# Altium PCB LM399.PcbDoc
Units mm, origin at the board's own origin, x right, y up, seen from the top; angles counter-clockwise.
Board outline 82.6 x 50.5 mm, 4 copper layers (Top Layer, Layer 1, Layer 2, Bottom Layer), stack 1.587 mm thick; 51 components, 21 nets, 188 pads, 258 vias.
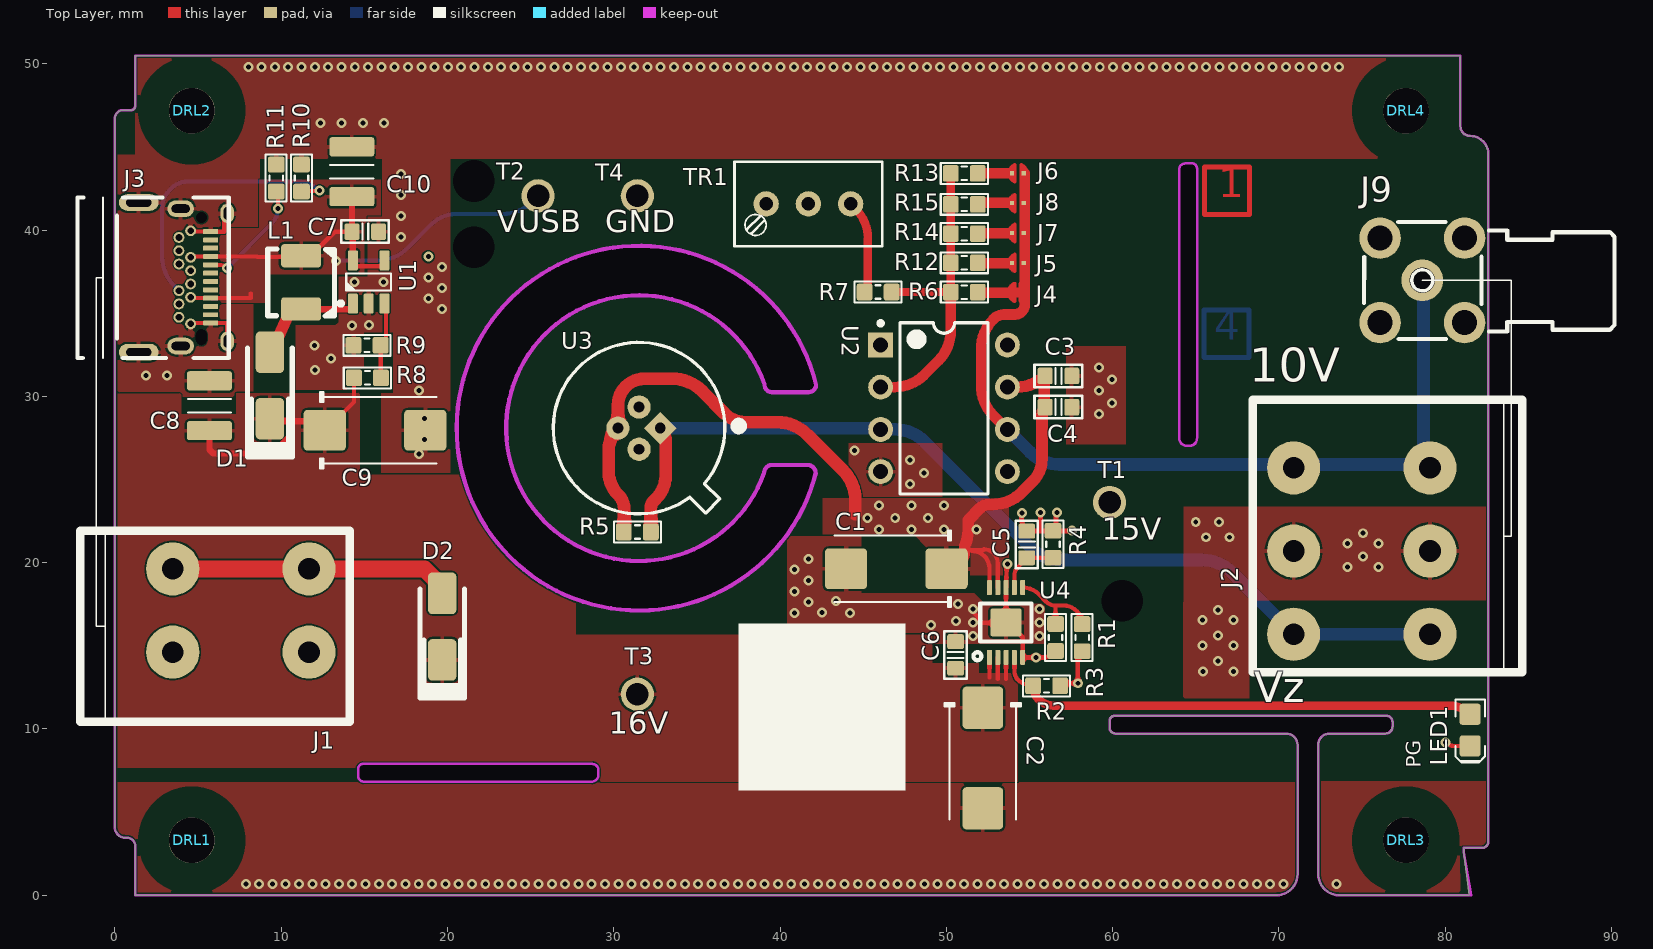
[diagram p0: Top Layer view]
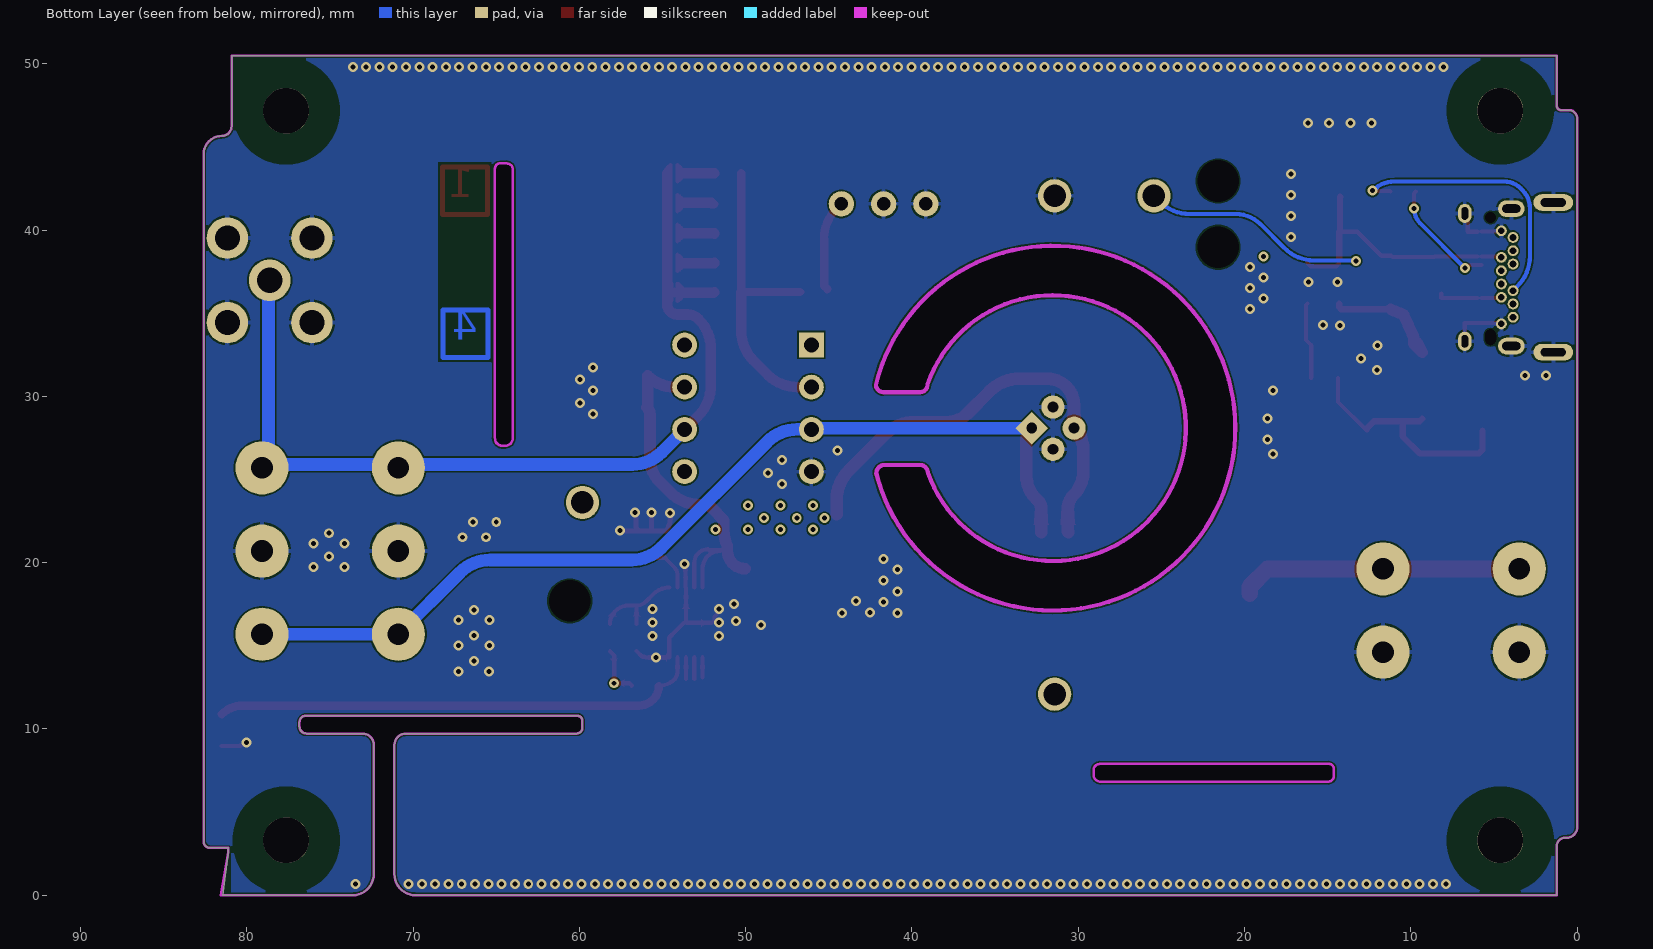
[diagram p1: Bottom Layer view, seen from below]
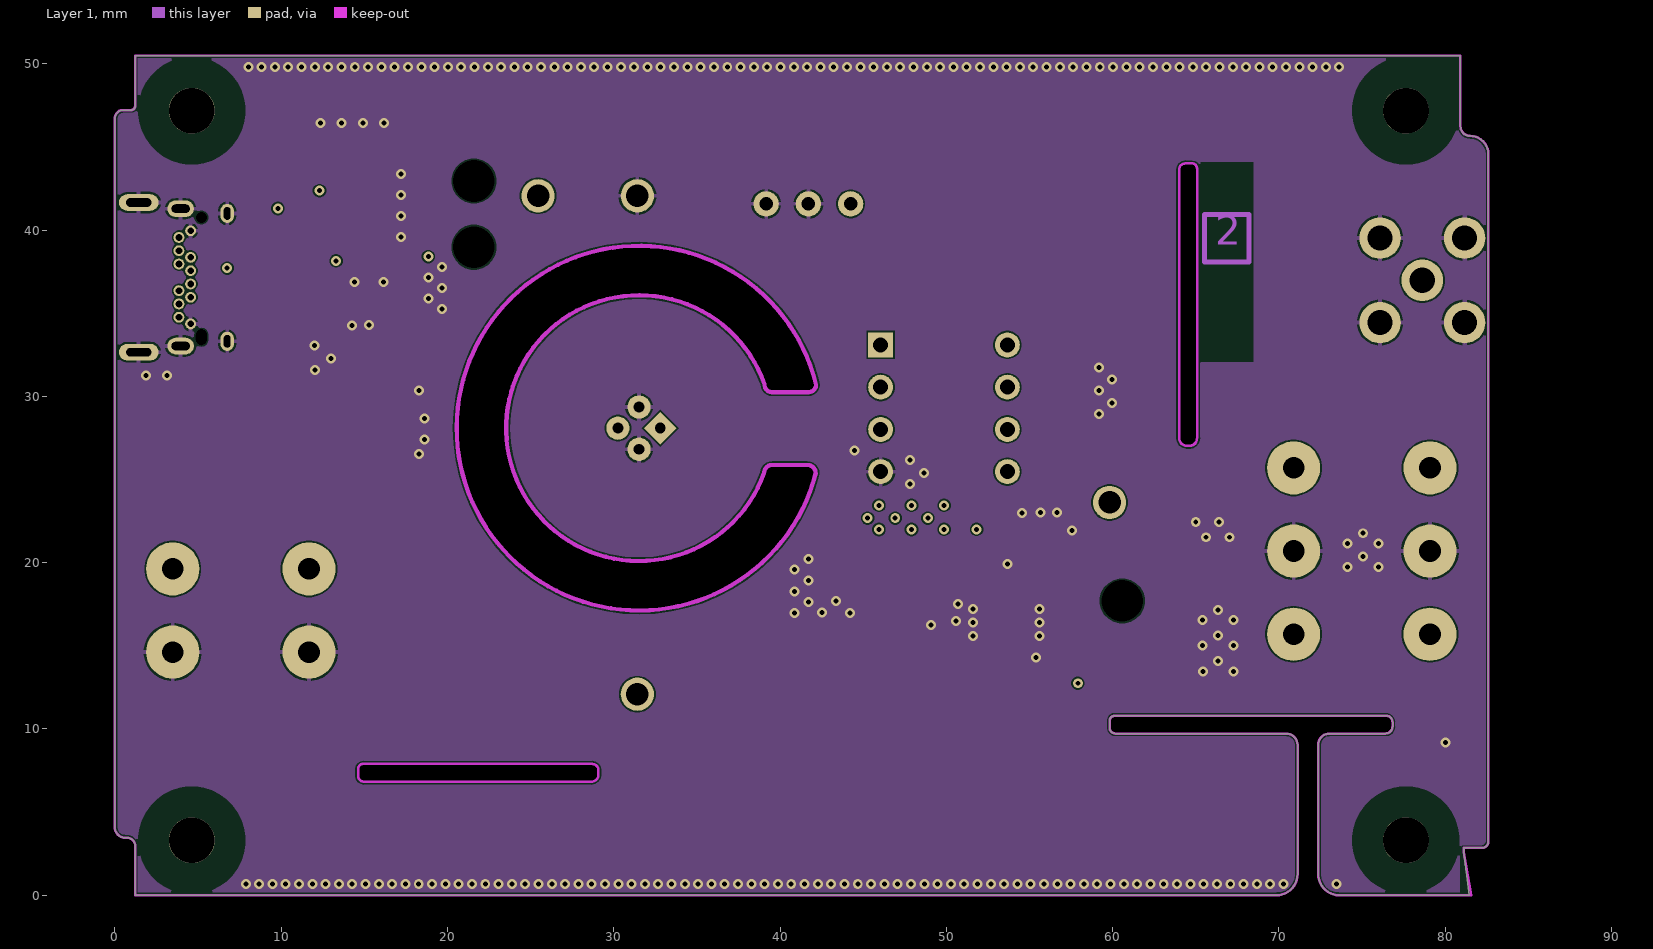
[diagram p2: Layer 1]
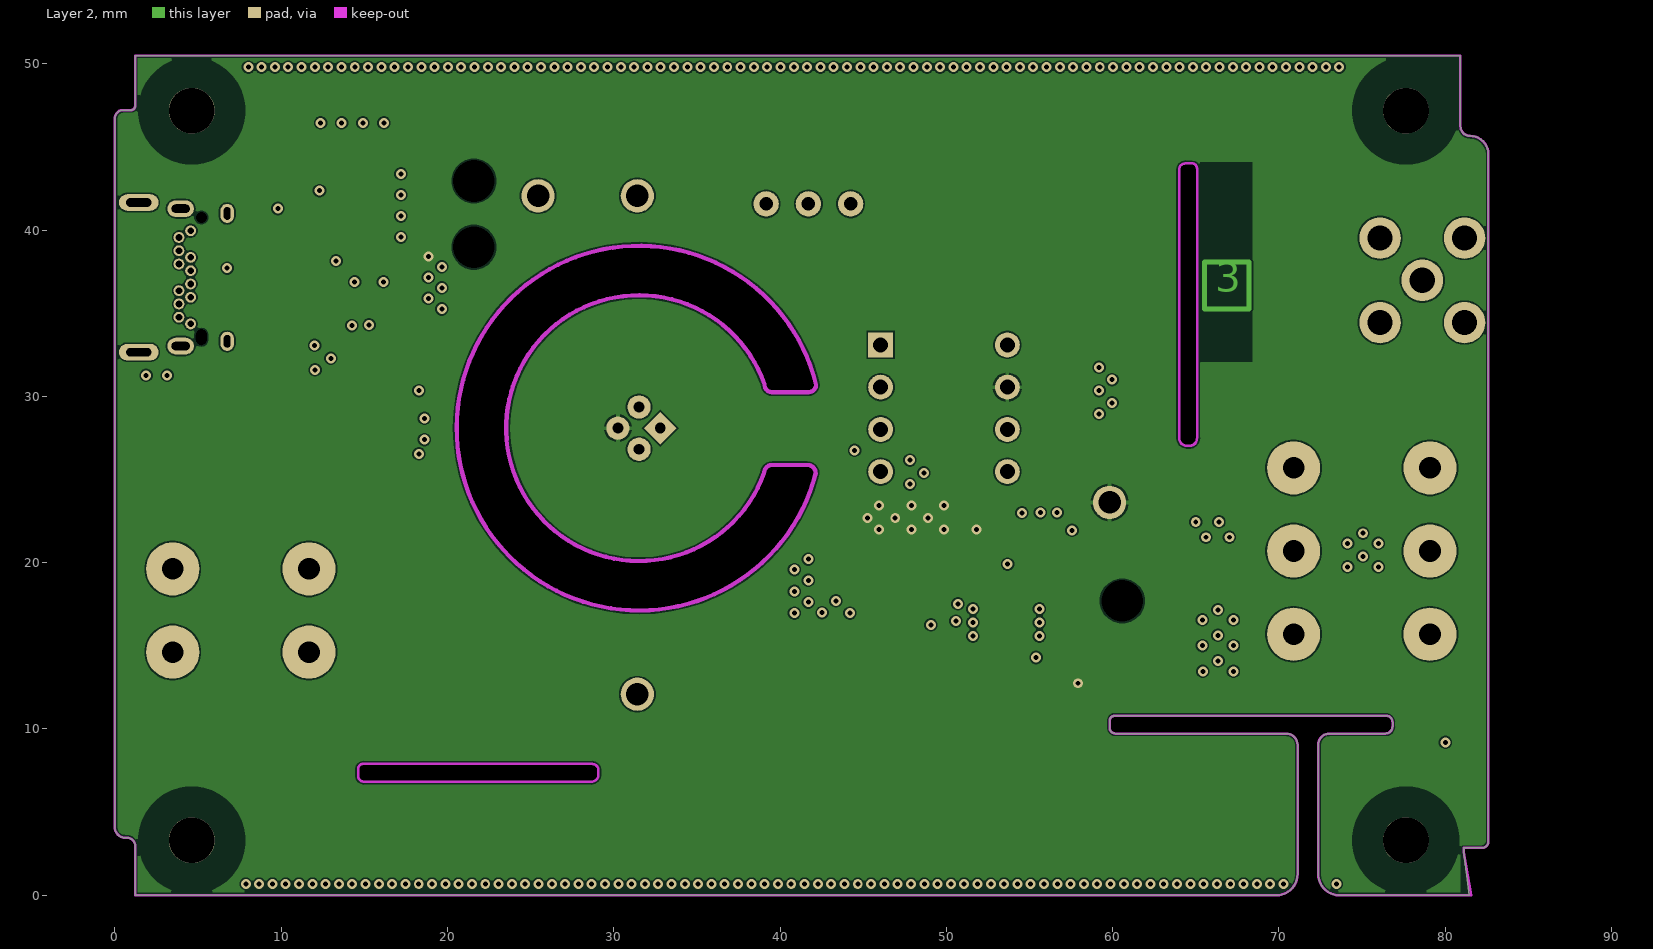
[diagram p3: Layer 2]
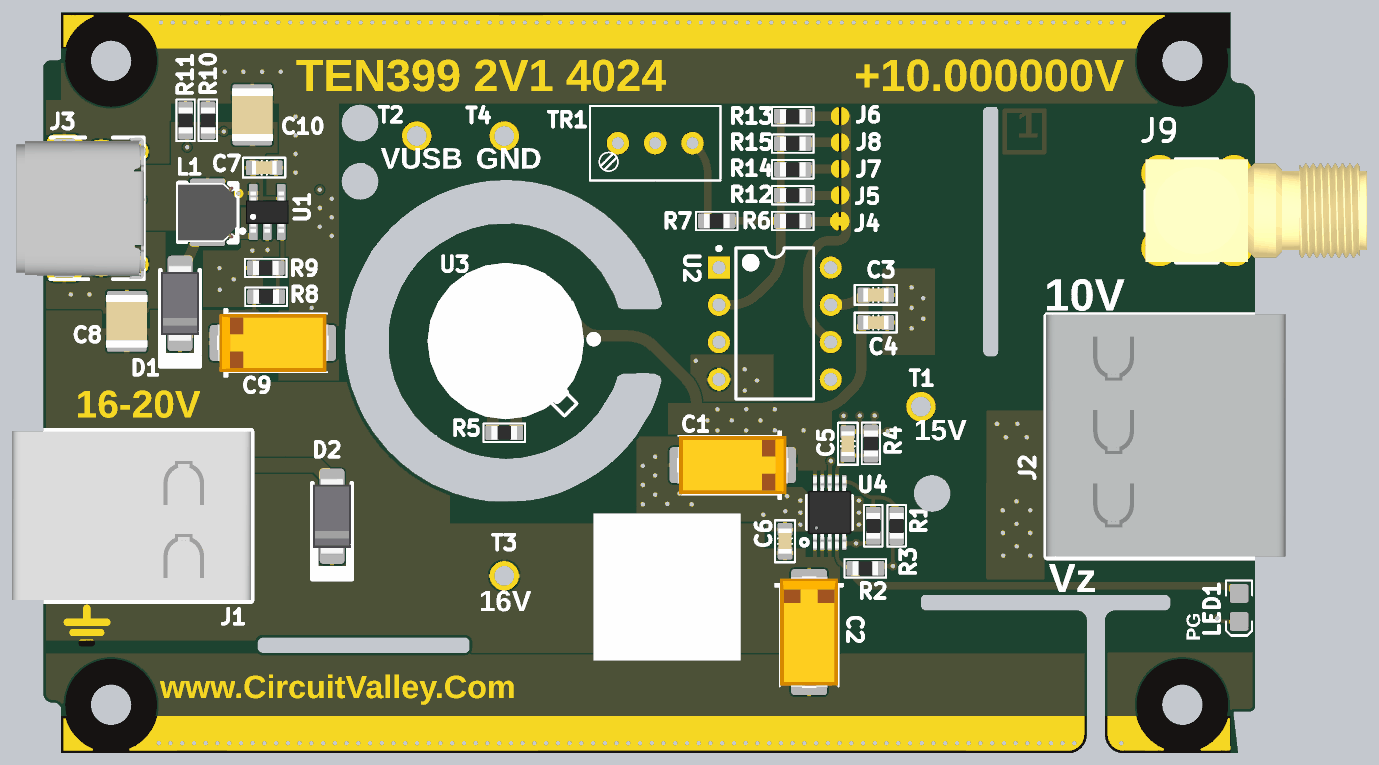
[diagram p4: 3D render of the assembled board from above, using the file's embedded part models]

## Layer stack, top to bottom
Top Solder: solder mask 0.0102, Solder Resist, Dk 3.5
Top Layer: signal copper 0.0356
Dielectric 2: prepreg 0.2104, PP-006, Dk 4.1
Layer 1: signal copper 0.0152
Dielectric 1: dielectric 1.065, FR-4, Dk 4.8
Layer 2: signal copper 0.0152
Dielectric 3: prepreg 0.2104, PP-006, Dk 4.1
Bottom Layer: signal copper 0.0356
Bottom Solder: solder mask 0.0102, Solder Resist, Dk 3.5

## Board outline
0.635,3.454 0.737,3.454 cw(c0.737,2.972) 1.219,2.972 1.219,0 69.85,0 ccw(c69.85,1.27) 71.12,1.27 71.12,9.042 ccw(c70.434,9.042) 70.434,9.728 60.164,9.728 cw(c60.164,10.075) 59.817,10.075 59.817,10.493 cw(c60.119,10.493) 60.119,10.795 76.452,10.795 cw(c76.452,10.414) 76.833,10.414 76.833,10.158 cw(c76.403,10.158) 76.403,9.728 73.05,9.728 ccw(c73.05,9.042) 72.365,9.042 72.365,1.27 ccw(c73.635,1.27) 73.635,0 81.432,0 81.128,2.591 81.128,2.845 82.194,2.845 ccw(c82.194,3.251) 82.601,3.251 82.601,44.552 ccw(c81.483,44.552) 81.483,45.669 cw(c81.483,46.233) 80.919,46.233 80.919,50.5 1.219,50.5 1.219,47.463 cw(c0.975,47.463) 0.975,47.219 0.508,47.219 ccw(c0.508,46.711) 0,46.711 0,4.089 ccw(c0.635,4.089)
cut-out: 64.033,27.457 ccw(c64.465,27.457) 64.465,27.026 64.74,27.026 ccw(c64.74,27.371) 65.085,27.371 ccw(c65.049,27.407) 65.1,27.407 65.1,43.741 ccw(c64.798,43.741) 64.798,44.044 64.38,44.044 ccw(c64.38,43.697) 64.033,43.697
cut-out: 14.986,6.833 cw(c14.986,7.214) 14.605,7.214 14.605,7.469 cw(c15.035,7.469) 15.035,7.899 28.711,7.899 cw(c28.711,7.553) 29.058,7.553 29.058,7.135 cw(c28.755,7.135) 28.755,6.833
cut-out: 39.522,30.251 41.705,30.251 ccw(c41.705,30.716) 42.17,30.716 41.91,31.623 41.504,32.639 41.199,33.249 40.742,34.011 40.31,34.646 39.776,35.306 39.141,35.992 38.278,36.754 37.541,37.262 36.525,37.871 35.56,38.303 34.544,38.659 33.426,38.913 32.41,39.04 31.471,39.065 30.404,39.014 29.54,38.887 28.55,38.659 27.788,38.405 27.026,38.1 26.365,37.77 25.679,37.389 25.044,36.957 24.46,36.5 23.749,35.865 23.012,35.052 22.377,34.239 21.819,33.198 21.438,32.41 21.082,31.521 20.676,29.921 20.574,28.804 20.549,27.737 20.599,26.873 20.752,25.908 20.98,24.968 21.488,23.647 21.895,22.809 22.504,21.844 23.444,20.676 24.308,19.837 25.273,19.075 26.518,18.313 27.991,17.704 29.134,17.374 30.328,17.17 31.14,17.145 32.233,17.17 33.122,17.221 33.985,17.374 35.154,17.704 35.916,18.034 36.855,18.517 37.744,19.05 38.43,19.558 39.243,20.269 39.827,20.904 40.411,21.615 40.97,22.555 41.402,23.216 41.707,23.952 41.91,24.511 42.146,25.373 42.037,25.705 41.636,25.883 41.072,25.908 39.536,25.883 39.141,25.705 39.043,25.39 38.862,24.867 38.379,24.054 37.795,23.139 36.932,22.2 36.347,21.692 35.585,21.209 35.027,20.904 34.214,20.549 33.401,20.32 32.588,20.142 31.521,20.066 30.658,20.142 29.87,20.269 29.058,20.472 28.219,20.828 27.178,21.361 26.391,21.946 25.908,22.403 25.324,23.012 24.841,23.724 24.435,24.333 23.952,25.451 23.749,26.238 23.597,27 23.52,27.965 23.546,28.702 23.622,29.362 23.774,30.099 24.054,30.912 24.409,31.775 24.943,32.664 25.451,33.325 26.289,34.163 27.026,34.696 28.169,35.357 29.235,35.763 30.302,36.017 31.191,36.068 32.08,36.093 33.071,35.966 34.239,35.636 35.128,35.23 35.839,34.823 36.551,34.315 37.287,33.63 38.024,32.766 38.456,32.029 38.913,31.217 39.067,30.728 39.192,30.353

## Design rules (kind name [scope] priority, off if disabled: settings)
Clearance Clearance_GNDT [OnLayer('GND_T')] p1: gap=0.127 ignorepadtopadclearanceinfootprint=FALSE
Clearance Clearance_INT [OnLayer('Signal_INT')] p2: gap=0.127 ignorepadtopadclearanceinfootprint=FALSE
Clearance [All] p3: gap=0.092 ignorepadtopadclearanceinfootprint=FALSE
Clearance Clearance_PWR [OnLayer('PWR')] p4: gap=0.127 ignorepadtopadclearanceinfootprint=FALSE
Clearance Clearance_GNDB [OnLayer('GND_B')] p5: gap=0.127 ignorepadtopadclearanceinfootprint=FALSE
ComponentClearance [All] p1: gap=0.254 collisioncheckmode=3 verticalgap=0 showdistances=FALSE
DiffPairsRouting [All] p1: maxlimit=0.102 minlimit=0.102 mostfreqgap=0.102 toplayer_minwidth=0.117 toplayer_maxwidth=0.254 toplayer_prefwidth=0.117 midlayer1_minwidth=0.117 midlayer1_maxwidth=0.254 midlayer1_prefwidth=0.117 midlayer2_minwidth=0.117 midlayer2_maxwidth=0.254 midlayer2_prefwidth=0.117 bottomlayer_minwidth=0.117 bottomlayer_maxwidth=0.254 bottomlayer_prefwidth=0.117 maxuncoupledlength=12.7
HoleSize [All] p1: absolutevalues=TRUE maxlimit=5 minlimit=0.025 maxpercent=80.000 minpercent=20.000
MatchedLengths Matched_MIPI_GRP [InNetClass('MIPI')] p1: tolerance=0.127 checknetsindiffpair=FALSE checkdiffpairvsdiffpair=TRUE checkxsignals=TRUE checkothers=TRUE
MatchedLengths Matched_MIPI [InNetClass('MIPI')] p2: tolerance=0.127 checknetsindiffpair=TRUE checkdiffpairvsdiffpair=FALSE checkxsignals=FALSE checkothers=FALSE
MatchedLengths Matched_GPIF_GRP [InNetClass('GPIF')] p3: tolerance=1.27 checknetsindiffpair=FALSE checkdiffpairvsdiffpair=TRUE checkxsignals=TRUE checkothers=TRUE
MatchedLengths Matched_USB3FX_GRP [InNetClass('USB3FX')] p4: tolerance=0.127 checknetsindiffpair=FALSE checkdiffpairvsdiffpair=TRUE checkxsignals=TRUE checkothers=TRUE
MatchedLengths Match_USB3FX [InNetClass('USB3FX')] p5: tolerance=0.102 checknetsindiffpair=TRUE checkdiffpairvsdiffpair=FALSE checkxsignals=FALSE checkothers=FALSE
MatchedLengths Matched_USB3_GRP [InNetClass('USB3')] p6: tolerance=0.254 checknetsindiffpair=FALSE checkdiffpairvsdiffpair=TRUE checkxsignals=TRUE checkothers=TRUE
MatchedLengths Matched_USB2 [InNetClass('USB2')] p7: tolerance=1.016 checknetsindiffpair=TRUE checkdiffpairvsdiffpair=FALSE checkxsignals=FALSE checkothers=FALSE
MatchedLengths Matched_USB3 [InNetClass('USB3')] p8: tolerance=0.102 checknetsindiffpair=TRUE checkdiffpairvsdiffpair=FALSE checkxsignals=FALSE checkothers=FALSE
MinimumSolderMaskSliver [All] p1: minsoldermaskwidth=0.001
PlaneClearance [All] p1: clearance=0.152
PlaneConnect PlaneConnect_1 [All] p1: pad.planeconnectstyle=Relief pad.reliefexpansion=0.508 pad.reliefentries=4 pad.reliefconductorwidth=0.254 pad.reliefairgap=0.127 via.planeconnectstyle=Direct via.reliefexpansion=0.508 via.reliefentries=4 via.reliefconductorwidth=0.254 via.reliefairgap=0.254
PolygonConnect [All] p1: thpad.connectstyle=Relief thpad.reliefconductorwidth=0.254 thpad.reliefentries=4 thpad.polygonreliefangle="90 Angle" thpad.airgapwidth=0.127 smdpad.connectstyle=Relief smdpad.reliefconductorwidth=0.254 smdpad.reliefentries=4 smdpad.polygonreliefangle="90 Angle" smdpad.airgapwidth=0.127 via.connectstyle=Direct via.reliefconductorwidth=0.254 via.reliefentries=4 via.polygonreliefangle="90 Angle" via.airgapwidth=0.254
RoutingVias [All] p1: holewidth=0.2 width=0.45 viastyle="Through Hole" minholewidth=0.2 minwidth=0.45 maxholewidth=6.3 maxwidth=7
SilkToSilkClearance [All] p1: silktosilkclearance=0
SilkToSolderMaskClearance [IsPad] p1: minsilkscreentomaskgap=0 clearancetoexposedcopper=TRUE
SolderMaskExpansion [All] p1: expansion=0.025 istentingtop=FALSE
Width [All] p1: maxlimit=1.27 minlimit=0.09 preferedwidth=0.127 midlayer1_minwidth=0.127 midlayer2_minwidth=0.127 minimp=50.000000 maximp=50.000000 favimp=50.000000
22 further rules are at their usual default settings.

## Components (designator, comment, footprint, x,y, rotation, side; value= is the part's Value field where it differs from the comment)
C1 "47uf 20V D" CAPMP7343X310N 46.99,19.634 r180 top value="22uf 20V D"
C2 "47uf 20V D" CAPMP7343X310N 52.197,8.255 r270 top value="22uf 20V D"
C3 "approved sub OK" CAPC1608N 56.744,31.232 r0 top value=4.7uf
C4 "approved sub OK" CAPC1608N 56.744,29.352 r0 top value=100n
C5 "approved sub OK" CAPC1608N 54.839,21.095 r90 top value=4.7uf
C6 "approved sub OK" CAPC1608N 50.555,14.453 r90 top value=100n
C7 "approved sub OK" CAPC1608N 15.062,39.903 r0 top value=100n
C8 "10µ" CAPC3225N 5.69,29.439 r90 top
C9 "47uf 20V D" CAPMP7343X310N 15.646,27.965 r0 top value="22uf 20V D"
C10 "10µ" CAPC3225N 14.249,43.51 r90 top
D1 "SDT5A60SA-13" DO-214AC 9.322,30.658 r270 top
D2 "SDT5A60SA-13" DO-214AC 19.685,16.154 r270 top
DRL1 "Mounting" NO_COPPER_NOMASK_2m75_6m2#1 4.623,3.302 r0 top
DRL2 "Mounting" NO_COPPER_NOMASK_2m75_6m2#1 4.623,47.185 r0 top
DRL3 "Mounting" NO_COPPER_NOMASK_2m75_6m2#2 76.637,3.302 r0 top
DRL4 "Mounting" NO_COPPER_NOMASK_2m75_6m2#3 76.937,46.685 r0 top
J1 "2624-1102" 2624-1102 7.577,17.126 r270 top
J2 "2624-1103" 2624-1103 74.985,20.701 r90 top
J3 "USB C Connector" UT11113-11602-7H 1.877,37.16 r270 top
J4 "SMD Jumper Bridged" SMD_Jumper_bridge 54.283,36.259 r180 top net-tie
J5 "SMD Jumper" SMD_Jumper 54.307,38.03 r180 top net-tie
J6 "SMD Jumper" SMD_Jumper 54.307,43.421 r180 top net-tie
J7 "SMD Jumper" SMD_Jumper 54.307,39.827 r180 top net-tie
J8 "SMD Jumper" SMD_Jumper 54.307,41.624 r180 top net-tie
J9 "SMA" SMA_Connector 78.623,36.982 r270 top
L1 "10uh" FDSD0420-H-2R2M 11.201,36.858 r270 top value=FDSD0420D-100M=P3
LED1 "" LED-0805-K 81.5,9.934 r270 top
R1 "RES_NL_0603" RESC1608N 58.166,15.494 r90 top value=150K
R2 "RES_NL_0603" RESC1608N 56.032,12.598 r180 top value=5K1
R3 "RES_NL_0603" RESC1608N 56.566,15.502 r270 top value=3K3
R4 "RES_NL_0603" RESC1608N 56.413,21.107 r90 top value=150K
R5 "RES_NL_0603" RESC1608N 31.42,21.844 r0 top value=2K67
R6 "RES_NL_0603" RESC1608N 51.079,36.271 r0 top value=9K65
R7 "RES_NL_0603" RESC1608N 45.898,36.278 r180 top value=20K
R8 "RES_NL_0603" RESC1608N 15.189,31.115 r180 top value=59K
R9 "RES_NL_0603" RESC1608N 15.164,33.071 r0 top value=5K1
R10 "RES_NL_0603" RESC1608N 11.224,43.129 r90 top value=5K1
R11 "RES_NL_0603" RESC1608N 9.703,43.129 r90 top value=5K1
R12 "RES_NL_0603" RESC1608N 51.079,38.03 r0 top value=198K
R13 "RES_NL_0603" RESC1608N 51.079,43.409 r0 top value=110K
R14 "RES_NL_0603" RESC1608N 51.079,39.789 r0 top value=68K
R15 "RES_NL_0603" RESC1608N 51.079,41.548 r0 top value=NC
T1 "TestHook" TEST_PAD_HOOK 59.817,23.622 r0 top
T2 "TestHook" TEST_PAD_HOOK 25.451,42.062 r0 top
T3 "TestHook" TEST_PAD_HOOK 31.42,12.09 r0 top
T4 "TestHook" TEST_PAD_HOOK 31.42,42.062 r0 top
TR1 "TRIM-GENERIC" TRIMMER-MT 44.247,41.58 r180 top
U1 "LT1615ES5/AP3012" SOT23-5 15.265,36.881 r90 top
U2 "LT1001ACN8" N8 49.86,29.286 r0 top
U3 "LM399" TO-46 31.521,28.092 r180 top
U4 "LT3042" MSOP10 53.594,16.408 r0 top

## Footprints (in the part's own frame and the unit in brackets; to place one, negate y for a bottom-side part, rotate by r counter-clockwise, add the part's x,y. Pads: shape width x height; smd on the part's side, far side on the other; paste and mask are expansions set on the pad)
2624-1102 [mm] "Foxconn USB connector"
  round 3.2 hole 1.3: 1(-2.5,4.1) 1(-2.5,-4.1) 2(2.5,4.1) 2(2.5,-4.1)
  silkscreen extent -4.8,-9.65 6.7,6.55, body extent -4.8,-9.7 6.7,6.6, height 15.46
2624-1103 [mm] "wago"
  round 3.2 hole 1.3: 1(-5,-4.1) 1(-5,4.1) 2(0,4.1) 2(0,-4.1) 3(5,-4.1) 3(5,4.1)
  silkscreen extent -7.3,-9.65 9.09,6.55, body extent -7.3,-9.66 9.2,6.64, height 15.46
CAPC1608N [mm] "Chip Capacitor, Body 1.6x0.8mm, 0603, IPC Medium Density"
  round 0.254 on Mech14: 0(0,0)
  rrect25% 0.9x1 smd: 1(-0.8,0) 2(0.8,0)
  silkscreen extent -1.44,-0.67 1.42,0.68, body extent -0.85,-0.45 0.85,0.45, height 0.89
CAPC3225N [mm] "Chip Capacitor, Body 3.2x2.5mm, 1210, IPC Medium Density"
  round 0.508 on Mech14: 0(0,0)
  rrect25% 1.15x2.7 smd: 1(-1.5,0) 2(1.5,0)
  silkscreen extent -0.4,-1.3 0.4,1.3, body extent -1.8,-1.4 1.8,1.4, height 2.19
CAPMP7343X310N [mm] "Molded body capacitor, Body 7.3x4.3mm, 2917, IPC Nominal settings"
  round 1 on Mech14: 0(0,0)
  rrect20% 2.55x2.45 smd: 1(-3.025,0) 2(3.025,0)
  silkscreen extent -3.3,-2.3 3.7,2.3, body extent -3.8,-1.97 3.8,1.98, height 3.1
DO-214AC [mm] "SDT5A50SA-13 SDT5A60SA-13"
  rrect30% 2.5x1.7 smd: 1(-2,0) 2(2,0)
  silkscreen extent -2.26,-1.35 4.29,1.35, body extent -2.6,-1.3 2.6,1.3, height 2.42
FDSD0420-H-2R2M [mm] "Murata"
  rrect25% 1.4x2.4 smd: 1(-1.6,0) 2(1.6,0)
  silkscreen extent -2.01,-2.01 2.03,2.01, body extent -1.99,-2.03 2.01,1.97, height 2.01
LED-0805-K [mil]
  round 20 on Mech14: 0(0,0)
  rrect25% 50x50 smd: A(-37.5,0) K(37.5,0)
  Top Layer pour cut-out: -15,30 15,30 15,-30 -15,-30
  silkscreen extent -72,-35 77,35, body extent -39,-25 39,25, height 31
MSOP10 [mm] "LT3042"
  rrect35% 0.3x0.9 smd: 1(-1,-2.1) 2(-0.5,-2.1) 3(0,-2.1) 4(0.5,-2.1) 5(1,-2.1) 6(1,2.1) 7(0.5,2.1) 8(0,2.1) 9(-0.5,2.1) 10(-1,2.1)
  rrect15% 1.88x1.68 smd: 11(0,0)
  silkscreen extent -1.97,-2.27 1.52,1.14, body extent -1.5,-2.45 1.5,2.45, height 1.16
N8 [mm] "DIP, 8-Leads, Row Spacing 7.62mm, Pitch 2.54mm, Body 9.78x6.48mm"
  rect 1.5x1.5 hole 0.9: 1(-3.81,3.81)
  round 1.5 hole 0.9: 2(-3.81,1.27) 3(-3.81,-1.27) 4(-3.81,-3.81) 5(3.81,-3.81) 6(3.81,-1.27) 7(3.81,1.27) 8(3.81,3.81)
  silkscreen extent -3.93,-5.15 2.65,5.23, body extent -3.6,-5.15 3.6,5.15, height 4.45
NO_COPPER_NOMASK_2m75_6m2#1 [mm]
  round 6.3 on Keep-Out: 0(0,0)
  round 2.75 hole 2.75 unplated mask+1.75: D2m7(0,0)
NO_COPPER_NOMASK_2m75_6m2#2 [mm]
  round 6.3 on Keep-Out: 0(1,0)
  round 2.75 hole 2.75 unplated mask+1.75: D2m7(1,0)
NO_COPPER_NOMASK_2m75_6m2#3 [mm]
  round 2.75 hole 2.75 unplated mask+1.75: ""(0.7,0.5)
  round 6.3 on Keep-Out: ""(0.7,0.5)
RESC1608N [mm] "Chip Resistor, Body 1.6x0.8mm, 0603, IPC Medium Density"
  round 0.254 on Mech14: 0(0,0)
  rrect25% 0.95x1 smd: 1(-0.813,0) 2(0.813,0)
  silkscreen extent -1.41,-0.63 1.42,0.63, body extent -0.87,-0.47 0.88,0.48, height 0.54
SMA_Connector [mm] "SMA Right Angle"
  round 2.5 hole 1.524: 1(0,0) 2(-2.54,2.54) 2(-2.54,-2.54) 2(2.54,-2.54) 2(2.54,2.54)
  silkscreen extent -3.51,-3.5 3.53,11.56, body extent -3.5,-3.5 3.5,11.6, height 9.87
SMD_Jumper [mil]
  rect 10x10 smd paste-300: 1(-13.86,0.05)
  rect 10x10 smd paste-30: 2(14.14,0.05)
  Top Layer region: 8,18 10,18 20,8 20,-9 11,-18 8,-18
  Top Layer region: -8,18 -10,18 -20,8 -20,-9 -11,-18 -8,-18
  Top Layer lines w8: 7.17,20.43 cw(c-1,0) 7.17,-20.43 7.17,20.43 ; -7.17,20.43 ccw(c1,0) -7.17,-20.43 -7.17,20.43
SMD_Jumper_bridge [mil]
  round 1 smd paste-200: 1(-14,0) 2(14,0)
  Top Layer region: -15.73,-11 10,-11 10,11.99 -15.73,11.99
  Top Layer region: 3.06,-14.1 3.06,-20.36 3.37,-21.92 4.25,-23.24 5.57,-24.12 7.12,-24.43 7.12,-24.43 7.91,-24.36 8.93,-24.03 10.15,-23.46 12.24,-22.35 13.71,-21.4 15.5,-20.08 16.33,-19.34 17.48,-18.24 18.29,-17.36 19.04,-16.51 19.74,-15.6 20.48,-14.55 21.08,-13.62 21.42,-13.04 21.77,-12.41 22.01,-11.97 22.28,-11.45 22.72,-10.51 23.05,-9.73 23.36,-8.92 23.61,-8.18 23.83,-7.49 23.94,-7.09 24.09,-6.52 24.19,-6.11 24.5,-4.7 24.6,-4.08 24.73,-3.25 24.78,-2.78 24.83,-2.24 24.87,-1.74 24.91,-1.12 24.94,-0.64 24.93,-0.12 24.93,0.28 24.92,0.7 24.9,1.08 24.88,1.52 24.85,2 24.82,2.36 24.76,2.96 24.69,3.47 24.6,4.08 24.45,4.94 24.15,6.31 23.98,6.95 23.77,7.68 23.5,8.5 23.03,9.77 22.36,11.27 21.63,12.73 20.69,14.27 19.76,15.6 18.33,17.28 16.8,18.92 14.99,20.45 14.21,21.04 13.46,21.55 12.29,22.31 11.19,22.93 10.4,23.34 9.54,23.74 8.7,24.1 8.24,24.26 7.94,24.34 7.65,24.4 7.36,24.42 6.89,24.43 5.45,24.14 4.22,23.32 3.41,22.1 3.12,20.65 3.12,20.65 3.12,19.49
  Top Layer region: -3.06,14.1 -3.06,20.36 -3.37,21.92 -4.25,23.24 -5.57,24.12 -7.12,24.43 -7.12,24.43 -7.91,24.36 -8.93,24.03 -10.15,23.46 -12.24,22.35 -13.71,21.4 -15.5,20.08 -16.33,19.34 -17.48,18.24 -18.29,17.36 -19.04,16.51 -19.74,15.6 -20.48,14.55 -21.08,13.62 -21.42,13.04 -21.77,12.41 -22.01,11.97 -22.28,11.45 -22.72,10.51 -23.05,9.73 -23.36,8.92 -23.61,8.18 -23.83,7.49 -23.94,7.09 -24.09,6.52 -24.19,6.11 -24.5,4.7 -24.6,4.08 -24.73,3.25 -24.78,2.78 -24.83,2.24 -24.87,1.74 -24.91,1.12 -24.94,0.64 -24.93,0.12 -24.93,-0.28 -24.92,-0.7 -24.9,-1.08 -24.88,-1.52 -24.85,-2 -24.82,-2.36 -24.76,-2.96 -24.69,-3.47 -24.6,-4.08 -24.45,-4.94 -24.15,-6.31 -23.98,-6.95 -23.77,-7.68 -23.5,-8.5 -23.03,-9.77 -22.36,-11.27 -21.63,-12.73 -20.69,-14.27 -19.76,-15.6 -18.33,-17.28 -16.8,-18.92 -14.99,-20.45 -14.21,-21.04 -13.46,-21.55 -12.29,-22.31 -11.19,-22.93 -10.4,-23.34 -9.54,-23.74 -8.7,-24.1 -8.24,-24.26 -7.94,-24.34 -7.65,-24.4 -7.36,-24.42 -6.89,-24.43 -5.45,-24.14 -4.22,-23.32 -3.41,-22.1 -3.12,-20.65 -3.12,-20.65 -3.12,-19.49
SOT23-5 [mm]
  round 0.5 on Mech14: 0(0,0)
  rrect25% 1.2x0.6 smd: 1(-1.3,0.95) 2(-1.3,0) 3(-1.3,-0.95) 4(1.3,-0.95) 5(1.3,0.95)
  silkscreen extent -1.42,-1.35 0.51,1.81, body extent -1.4,-1.45 1.4,1.45, height 1.44
TEST_PAD_HOOK [mm] "1502-1, 1502-2, 1502-3, 1502-4, Turret"
  round 2 hole 1.35: 1(0,0)
TO-46 [mm] "LM399"
  rect 1.4x1.4 hole 0.65 rot 45: 1(-1.27,0)
  round 1.4 hole 0.65: 2(0,-1.27) 3(1.27,0) 4(0,1.27)
  silkscreen extent -6.24,-5.16 5.16,5.16, body extent -7.72,-7.54 7.54,7.72, height 8.94
TRIMMER-MT [mil]
  round 60 hole 32: 1(0,0) 2(200,0) W(100,0)
  silkscreen extent -75,-100 275,100
UT11113-11602-7H [mm] "Foxconn USB connector"
  oval 1x2.4 hole 0.5 slot 1.5 at 90 deg: 0(-4.5,-0.438) 0(4.5,-0.438)
  oval 1x1.6 hole 0.5 slot 1.1 at 90 deg: 0(-4.13,2.077) 0(4.13,2.077)
  oval 1.15x0.8 hole 0.4 slot 0.75 at 0 deg: 0(-3.845,4.877) 0(3.845,4.877)
  round 0.1 hole 0.65 unplated: 1(-3.6,3.327)
  round 0.1 hole 0.65 slot 0.95 at 0 deg unplated: 1(3.6,3.327)
  rrect20% 0.3x0.9 smd: A1(-2.75,3.887) A2(-2.25,3.887) A3(-1.75,3.887) A4(-1.25,3.887) A5(-0.75,3.887) A6(-0.25,3.887) A7(0.25,3.887) A8(0.75,3.887) A9(1.25,3.887) A10(1.75,3.887) A11(2.25,3.887) A12(2.75,3.887)
  round 0.65 hole 0.4: B1(2.8,2.677) B2(2.4,1.977) B3(1.6,1.977) B4(1.2,2.677) B5(0.8,1.977) B6(0.4,2.677) B7(-0.4,2.677) B8(-0.8,1.977) B9(-1.2,2.677) B10(-1.6,1.977) B11(-2.4,1.977) B12(-2.8,2.677)
  silkscreen extent -4.8,-4.12 4.85,4.98, body extent -4.8,-3.71 4.85,4.99, height 3.19

## Part data
C1 C2 C9: library part CAPT_330u_2917_6V3, "Capacitor SMD Tant 330uF 20% 6V3 2917", ESR (Equivalent Series Resistance)="15 mOhm", Manufacturer Part Number=T520D337M006ATE015, Manufacturer Size Code=D, Operating Temperature="-55°C ~ 125°C", Package / Case="2917 (7343 Metric)", Ratings=6.3V, Supplier Part Number 1=399-4052-1-ND, Tolerance=±20%, ComponentLink1Description="T520D Datasheet", ComponentLink1URL=http://www.kemet.com/datasheets&T520D337M006ATE015, Height - Seated (Max)="0.122\" (3.10mm)", Material="Solid Tantalum", Part=TCJY226M025R0070, Size / Dimension="0.287\" L x 0.169\" W (7.30mm x 4.30mm)", Supplier 1=Digi-Key
C3 C4 C5 C6 C7: library part CAPC_1n_0603_100V, "Capacitor SMD Cer 1nF 10% 100V X7R 0603", Manufacturer 1="Murata Electronics North America", Manufacturer Part Number 1=GCM188R72A102KA37D, Operating Temperature="-55°C ~ 125°C", Package / Case="0603 (1608 metric)", Ratings="100V; X7R", Supplier Part Number 1=490-4780-1-ND, Tolerance=±10%, ComponentLink1Description=http://search.murata.co.jp/Ceramy/image/img/PDF/ENG/GCM188R72A102KA37.pdf, ComponentLink1URL=http://search.murata.co.jp/Ceramy/image/img/PDF/ENG/GCM188R72A102KA37.pdf, Material=ceramic, Size / Dimension="0.063\" L x 0.031\" W (1.60mm x 0.80mm)", Supplier 1=Digi-Key, Thickness (Max)="0.035\" (0.90mm)"
C8 C10: library part CAPC_10u_1210_50V, "Capacitor SMD Cer 10uF 20% 16V X5R 1210", Manufacturer 1="Taiyo Yuden", Manufacturer Part Number 1=UMK325BJ106MM-T, Package / Case="1210 (3225 Metric)", Ratings="50V; X5R", Supplier Part Number 1=587-2225-1-ND, Tolerance=±20%, Material=ceramic, Size / Dimension="0.126\" L x 0.098\" W (3.20mm x 2.50mm)", Supplier 1=Digi-Key
D1 D2: library part Schottky_diode
DRL1 DRL2 DRL3 DRL4: library part Mountinghole, "Mounting Hole"
J3: library part USB_C, "USB C connector"
J4: library part SMD_Jumper_Bridged, "SMD Jumper"
J5 J6 J7 J8: library part SMD_Jumper
J9: library part "SMA Connector"
L1: library part inductor_smd
LED1: library part LED_SMD_Green_0805, "LED, 0805 SMD, Green", Manufacturer 1=Ligitek, Manufacturer Part Number 1=LG170G-CT, Package / Case=0805, Ratings="10 mcd; 573 nm", Material=GaP
R1 R2 R3 R4 R5 R6 R7 R8 R9 R10 R11 R12 R13 R14 R15: "Resistor, SMD chip", Manufacturer 1="Royal Ohm", Package / Case="0603 (1608 metric)", Ratings="1/10 W", Tolerance=±5%
TR1: library part THTRIM-GENERIC, "TRIMMABLE RESISTOR"
U1: library part AP3012, "Boost Conveter"
U2: "General Purpose, High Precision Op Amp", ComponentLink1Description="Manufacturer Link", ComponentLink1URL=http://www.linear.com/, ComponentLink2Description=Datasheet, ComponentLink2URL=http://www.linear.com/pc/downloadDocument.do?navId=H0,C1,C1154,C1009,C1021,P1206,D1672, DatasheetVersion=1990, LatestRevisionDate=29-May-2009, LatestRevisionNote="Component Body Added.", Note="Pin 5 is NC (not internally connected) pin.", PackageDescription="DIP, Plastic, 8-Pin, Row Spacing 7.62 mm, Pitch 2.54 mm", PackageReference=N8, PackageVersion="N8 1002", Published=8-Jun-2000, Publisher="Altium Limited"
U4: "Low noise Linear Regulator"
U3: Part=LM399

## Free pads (board coordinates)
  round 0 hole 2.5 unplated: M4(21.59,38.972) M4(21.59,42.951) M4(60.579,17.704)

## Via types
v1: diameter 0.6, hole 0.3, Top Layer to Bottom Layer, 255 vias
v2: diameter 0.6, hole 0.3, Top Layer to Bottom Layer, tented top, 3 vias

## Nets (pads, with @x,y where several pads share a name; then routed paths per layer and width w, separated by ;. In a path a pad name is that pad's centre, name@x,y a point inside that pad or via, vN(x,y) a via of type N, cw(c..) or ccw(c..) an arc to the next point about the centre after c; other vN are vias at no path point)
15V: C1.1 C3.1 C4.1 R1.1 R2.1 R5.1 T1.1 U2.7 U3.3 U4.9 U4.10 | length 54.2
  Top Layer w0.254: 51.308,20.767 52.255,20.767 ; 51.535,20.708 cw(c51.535,19.649) 52.594,19.649 U4.10 ; 52.273,20.803 cw(c52.273,19.982) 53.094,19.982 U4.9 ; R2.1 56.998,12.751 v1(57.904,12.751) 57.904,14.419 R1.1
  Top Layer w0.7: C1.1 ccw(c50.015,20.72) 51.101,20.72 51.101,20.974 ccw(c48.768,21.979) 51.308,21.979 51.308,22.555 52.05,23.297 cw(c52.527,22.82) 52.527,23.495 52.745,23.495 ccw(c52.745,26.035) 54.541,24.239 55.203,24.901 ccw(c53.876,26.228) 55.753,26.228 55.753,28.892 cw(c56.404,28.892) C4.1 ; U2.7 54.261,30.556 ccw(c54.261,32.865) 55.894,31.232 C4.1@55.894,29.352
  Top Layer w0.762: R5.1 ccw(c30.544,21.906) 30.632,21.906 30.632,23.221 ccw(c29.418,23.221) 30.277,24.079 cw(c31.687,25.49) 29.693,25.49 29.693,26.743 cw(c31.6,26.743) U3.3 30.251,29.464 cw(c31.852,29.464) 31.852,31.064 33.517,31.064 cw(c33.517,28.524) 35.313,30.32 36.678,28.956 ccw(c37.904,30.182) 37.904,28.448 39.842,28.448 cw(c39.842,25.908) 41.638,27.704 43.782,25.56 cw(c41.986,23.764) 44.526,23.764 44.526,22.911
  other v1: 45.95,21.996 47.906,21.996 49.862,22.006 51.818,22.006 45.263,22.682 46.928,22.682 48.884,22.682 45.95,23.442 47.906,23.442 49.862,23.442 18.847,38.405
16V: C2.1 C6.1 C8.1 C9.1 D1.2 D2.2 R8.2 T3.1 U4.1 U4.2 U4.3 | length 18.6
  Top Layer w0.254: C9.1 12.671,27.965 14.376,29.67 R8.2 ; 52.594,13.09 U4.1 ; 53.094,13.005 U4.2 ; 53.594,13.005 U4.3
  Top Layer w0.381: C8.1 5.69,26.792 5.915,26.567 9.47,26.567 10.487,27.584 10.487,28.505 ; D1.2 9.474,28.505 10.487,28.505 ; C9.1@12.621,28.099 12.215,28.505 10.487,28.505
GND: C1.2 C2.2 C3.2 C4.2 C5.2 C6.2 C7.2 C8.2 C9.2 C10.2 J1.2 J2.2 J3.0 J3.A1 J3.A12 J3.B1 J3.B12 J9.2 LED1.K R3.2 R4.2 R9.1 R10.2 R11.2 T4.1 TR1.2 TR1.W U1.2 U2.4 U3.2 U3.4 U4.5 U4.8 U4.11 | length 24.8
  Top Layer w0.254: J3.B1 cw(c4.604,34.36) 4.604,34.41 J3.A12 6.754,34.41 J3.0@6.754,33.315 ; J3.B12 ccw(c4.604,39.96) 4.604,39.91 J3.A1 ; J3.A1@6.006,39.908 6.584,39.908 6.584,41.005 J3.0@6.754,41.005 ; v1@51.598,17.146 51.598,17.052 51.882,16.767 51.882,16.563 52.062,16.383 53.569,16.383 U4.11 U4.8 53.617,18.531 53.617,19.855 v1(53.681,19.919) ; U4.11@53.694,16.408 54.594,15.508 U4.5 54.602,14.3 v1(55.397,14.3) 56.044,14.3 56.084,14.341 56.218,14.341 R3.2 ; v1(80.011,9.198) ccw(c80.532,9.719) 80.532,8.982 LED1.K
  Top Layer w0.3: v1(54.54,22.997) ccw(c54.834,22.934) 54.534,22.934 54.534,22.63 ccw(c55.574,22.63) C5.2 cw(c54.901,21.832) 54.901,21.92 55.657,21.92 ; v1(55.651,23.012) 55.657,23.007 55.657,21.92 ; v1(56.665,23.012) 56.607,22.954 56.607,22.114 R4.2 ; v1(57.556,21.946) cw(c57.496,22.006) 57.496,21.92 R4.2 ; 55.657,21.92 R4.2
  other v1: 7.874,0.686 8.674,0.686 9.474,0.686 10.274,0.686 11.074,0.686 11.874,0.686 12.674,0.686 13.474,0.686 14.274,0.686 15.074,0.686 15.874,0.686 16.674,0.686 17.474,0.686 18.274,0.686 19.074,0.686 19.874,0.686 20.674,0.686 21.474,0.686 22.274,0.686 23.074,0.686 23.874,0.686 24.674,0.686 25.474,0.686 26.274,0.686 27.074,0.686 27.874,0.686 28.674,0.686 29.474,0.686 30.274,0.686 31.074,0.686 31.874,0.686 32.674,0.686 33.474,0.686 34.274,0.686 35.074,0.686 35.874,0.686 36.674,0.686 37.474,0.686 38.274,0.686 39.074,0.686 39.874,0.686 40.674,0.686 41.474,0.686 42.274,0.686 43.074,0.686 43.874,0.686 44.674,0.686 45.474,0.686 46.274,0.686 47.074,0.686 47.874,0.686 48.674,0.686 49.474,0.686 50.274,0.686 51.074,0.686 51.874,0.686 52.674,0.686 53.474,0.686 54.274,0.686 55.074,0.686 55.874,0.686 56.674,0.686 57.474,0.686 58.274,0.686 59.074,0.686 59.874,0.686 60.674,0.686 61.474,0.686 62.274,0.686 63.074,0.686 63.874,0.686 64.674,0.686 65.474,0.686 66.274,0.686 67.074,0.686 67.874,0.686 68.674,0.686 69.474,0.686 70.274,0.686 73.474,0.686 65.422,13.469 67.268,13.469 66.345,14.097 65.397,15.013 67.268,15.013 51.598,15.578 55.593,15.578 66.332,15.633 49.073,16.256 51.598,16.4 55.593,16.4 50.571,16.485 65.397,16.557 67.268,16.557 40.867,16.967 44.196,16.967 42.532,16.993 66.332,17.17 51.598,17.221 55.593,17.221 50.692,17.523 41.699,17.623 43.364,17.701 40.867,18.278 41.699,18.933 40.867,19.589 74.13,19.747 75.975,19.747 41.699,20.21 75.053,20.375 74.13,21.159 75.975,21.159 65.612,21.531 67.024,21.531 75.053,21.772 64.999,22.454 66.396,22.454 47.811,24.719 48.643,25.405 47.811,26.165 18.288,26.543 44.48,26.752 18.618,27.407 18.618,28.677 59.184,28.953 59.969,29.616 18.288,30.353 59.184,30.35 59.969,31.013 1.88,31.267 3.15,31.267 12.039,31.591 59.184,31.747 12.984,32.293 12.013,33.065 14.248,34.258 15.287,34.299 19.66,35.255 18.847,35.89 19.66,36.525 18.847,37.16 19.66,37.795 17.196,39.573 17.196,40.843 17.196,42.113 17.196,43.383 12.372,46.447 13.642,46.447 14.912,46.447 16.182,46.447 8.026,49.801 8.826,49.801 9.626,49.801 10.426,49.801 11.226,49.801 12.026,49.801 12.826,49.801 13.626,49.801 14.426,49.801 15.226,49.801 16.026,49.801 16.826,49.801 17.626,49.801 18.426,49.801 19.226,49.801 20.026,49.801 20.826,49.801 21.626,49.801 22.426,49.801 23.226,49.801 24.026,49.801 24.826,49.801 25.626,49.801 26.426,49.801 27.226,49.801 28.026,49.801 28.826,49.801 29.626,49.801 30.426,49.801 31.226,49.801 32.026,49.801 32.826,49.801 33.626,49.801 34.426,49.801 35.226,49.801 36.026,49.801 36.826,49.801 37.626,49.801 38.426,49.801 39.226,49.801 40.026,49.801 40.826,49.801 41.626,49.801 42.426,49.801 43.226,49.801 44.026,49.801 44.826,49.801 45.626,49.801 46.426,49.801 47.226,49.801 48.026,49.801 48.826,49.801 49.626,49.801 50.426,49.801 51.226,49.801 52.026,49.801 52.826,49.801 53.626,49.801 54.426,49.801 55.226,49.801 56.026,49.801 56.826,49.801 57.626,49.801 58.426,49.801 59.226,49.801 60.026,49.801 60.826,49.801 61.626,49.801 62.426,49.801 63.226,49.801 64.026,49.801 64.826,49.801 65.626,49.801 66.426,49.801 67.226,49.801 68.026,49.801 68.826,49.801 69.626,49.801 70.426,49.801 71.226,49.801 72.026,49.801 72.826,49.801 73.626,49.801
  other v2: 14.423,36.89 16.151,36.89
NetC5_1: C5.1 R4.1 U4.7 | length 3.6
  Top Layer w0.254: U4.7 54.094,19.226 cw(c54.815,19.226) 54.305,19.736 54.821,20.251 ccw(c54.777,20.295) C5.1 R4.1
NetD1_1: D1.1 L1.2 U1.1 | length 9.8
  Top Layer w0.381: L1.2 11.252,35.258 11.261,35.25 14.206,35.25 U1.1@14.315,35.36 ; U1.1@14.315,35.36 U1.1 ; U1.1@14.315,35.36 U1.1 ; U1.1@14.315,35.36 U1.1 ; U1.1@14.315,35.36 U1.1 ; U1.1@14.315,35.36 U1.1 ; U1.1@14.315,35.36 U1.1
  Top Layer w0.7: L1.2@11.212,35.232 10.527,34.949 10.428,34.908 9.822,33.558 9.822,33.158 D1.1 ; D1.1 D1.1@9.652,32.988 ; D1.1 D1.1@9.652,32.988 ; D1.1 9.652,33.252 D1.1@9.652,32.988
NetJ2_3: J2.3 J4.1 J5.1 J6.1 J7.1 J8.1 J9.1 U2.6 | length 55.2
  Top Layer w0.635: U2.6 52.839,28.847 cw(c54.635,30.643) 52.095,30.643 52.095,32.857 cw(c54.635,32.857) 52.839,34.653 52.857,34.671 cw(c53.471,34.058) 53.471,34.925 54.115,34.925 ccw(c54.115,35.535) 54.724,35.535 J6.1@54.724,43.419
  Bottom Layer w0.762: U2.6 55.034,26.652 ccw(c56.831,28.448) 56.831,25.908 78.585,25.908 cw(c78.585,25.201) 79.085,25.701 cw(c80.017,26.633) 78.699,26.633 78.699,36.906 J9.1
NetJ3_A5: J3.A5 R11.1 | length 6.9
  Top Layer w0.254: J3.A5 6.295,37.91 cw(c6.295,37.257) v2(6.756,37.719) ; R11.1 9.804,42.215 v1(9.804,41.3)
  Bottom Layer w0.254: v2(6.756,37.719) 9.427,40.39 ccw(c8.517,41.3) 9.755,40.946 ccw(c8.517,41.3) v1(9.804,41.3)
NetJ3_B5: J3.B5 R10.1 | length 17.2
  Top Layer w0.254: R10.1 11.253,42.345 12.278,42.345 v1(12.307,42.374)
  Bottom Layer w0.254: J3.B5 3.585,36.629 cw(c5.381,38.425) 2.841,38.425 2.841,41.306 cw(c4.414,41.306) 3.302,42.418 3.397,42.513 cw(c4.394,41.516) 4.394,42.926 10.975,42.926 cw(c10.975,41.043) v1(12.307,42.374) 12.213,42.374 12.05,42.538
NetJ4_2: J4.2 R6.2 | length 1.8
  Top Layer w0.635: R6.2 51.918,36.246 53.683,36.246
NetJ5_2: J5.2 R12.2 | length 2.1
  Top Layer w0.508: R12.2 R12.2@51.906,38.016 ; J5.2@53.893,38.011 53.893,38.029 J5.2
  Top Layer w0.635: R12.2 51.892,38.011 J5.2@53.893,38.011
NetJ6_2: J6.2 R13.2 | length 2.1
  Top Layer w0.508: J6.2@53.882,43.417 53.882,43.42 J6.2
  Top Layer w0.635: R13.2 51.892,43.417 J6.2@53.882,43.417
NetJ7_2: J7.2 R14.2 | length 2.1
  Top Layer w0.508: R14.2 R14.2@51.916,39.813 ; J7.2@53.849,39.822 53.849,39.826 J7.2
  Top Layer w0.635: R14.2 51.892,39.822 J7.2@53.849,39.822
NetJ8_2: J8.2 R15.2 | length 2.2
  Top Layer w0.381: R15.2 R15.2@51.955,41.61
  Top Layer w0.508: R15.2@51.892,41.548 cw(c52.073,41.367) R15.2@52.073,41.623 ; 53.799,41.637 53.799,41.623 J8.2
  Top Layer w0.635: R15.2@52.073,41.623 52.073,41.637 53.799,41.637
NetR1_2: R1.2 R3.1 U4.6 | length 5.7
  Top Layer w0.254: U4.6 cw(c54.594,17.165) 54.854,18.483 cw(c54.594,17.165) 55.543,18.116 56.006,17.653 ccw(c56.56,18.207) 56.56,17.423 ; R3.1@56.56,16.32 56.56,17.423 ; R1.2 ccw(c57.05,16.307) 57.05,17.423 56.56,17.423
NetR6_1: R6.1 R7.1 R12.1 R13.1 R14.1 R15.1 U2.2 | length 19
  Top Layer w0.508: U2.2 46.878,30.556 ; R7.1 R6.1@50.266,36.278 ; R6.1 R6.1@50.266,36.278 ; R13.1 R15.1 R14.1 R12.1 R6.1@50.266,36.278
  Top Layer w0.635: 46.878,30.556 ccw(c46.878,33.096) 48.674,31.3 49.522,32.149 ccw(c47.726,33.945) 50.266,33.945 R6.1
NetR7_2: R7.2 TR1.1 | length 5.5
  Top Layer w0.508: TR1.1 44.544,41.282 cw(c42.748,39.486) 44.867,40.887 cw(c42.748,39.486) 45.288,39.486 45.288,36.652 R7.2@45.085,36.449
NetR8_1: R8.1 R9.2 U1.3 | length 4.6
  Top Layer w0.254: R8.1 15.989,31.128 15.989,33.058 R9.2 16.299,33.393 16.299,35.497 U1.3
PG: LED1.A R2.2 U4.4 | length 29.5
  Top Layer w0.254: U4.4 54.094,13.522 ccw(c55.016,13.522) 54.117,13.317 ccw(c55.016,13.522) 54.249,13.011 54.266,12.993 ccw(c55.219,13.947) 54.408,12.87 ccw(c55.219,13.947) R2.2 ccw(c56.384,12.598) R2.2@55.219,12.584 ; 55.561,11.775 55.575,11.76
  Top Layer w0.508: R2.2@55.219,12.584 ccw(c56.384,12.598) 55.561,11.775 ; 55.575,11.76 ccw(c56.434,12.619) 56.434,11.405 80.249,11.405 cw(c80.249,9.635) 81.162,11.151 cw(c80.249,9.635) LED1.A
PRI_16V: D2.1 J1.1 | length 15.7
  Top Layer w1.016: J1.1@4.877,19.626 13.077,19.626 18.613,19.626 19.685,18.554 D2.1
VUSB: C7.1 C10.1 J3.A4 J3.A9 J3.B4 J3.B9 L1.1 T2.1 U1.4 U1.5 | length 33.5
  Top Layer w0.254: J3.B4 ccw(c4.675,36.081) 4.675,35.91 J3.A9 ; J3.B9 cw(c4.675,38.239) 4.675,38.41 J3.A4 ; J3.A4@6.003,38.409 7.163,38.409 ; J3.A9@6.004,35.91 8.179,35.91 8.179,36.195 ; 7.164,38.41 8.56,38.41 8.56,38.379 11.122,38.379 L1.1 ; L1.1@11.278,38.458 11.778,38.458 13.223,39.903 C7.1 ; U1.5 14.315,37.998 14.488,37.825 16.042,37.825 16.215,37.998 U1.4
  Top Layer w0.381: C10.1 14.262,42.01 C7.1 14.315,39.903 U1.5
  Bottom Layer w0.254: v1(13.31,38.151) cw(c13.371,38.089) 13.371,38.176 15.813,38.176 ccw(c15.813,40.716) 17.61,38.92 19.049,40.36 cw(c20.523,38.885) 20.523,40.97 23.306,40.97 ccw(c23.306,43.51) 25.103,41.714 T2.1
VZ_RAW: J2.1 R5.2 U2.3 U3.1 | length 58
  Top Layer w0.762: R5.2 32.233,23.294 cw(c32.84,23.294) 32.41,23.724 32.565,23.878 ccw(c31.221,25.222) 33.122,25.222 33.122,27.295 ccw(c31.994,27.295) U3.1 U3.1@32.791,27.821
  Bottom Layer w0.762: U3.1 45.974,28.092 U2.3 46.903,28.016 cw(c46.903,25.476) 48.699,27.272 55.06,20.912 ccw(c56.856,22.708) 56.856,20.168 65.366,20.168 cw(c65.366,17.628) 67.162,19.424 70.885,15.701 J2.1@79.085,15.701
pads on no net: C1.0 C2.0 C3.0 C4.0 C5.0 C6.0 C7.0 C8.0 C9.0 C10.0 DRL1.0 DRL1.D2m7 DRL2.0 DRL2.D2m7 DRL3.0 DRL3.D2m7 DRL4. J3.1 J3.A2 J3.A3 J3.A6 J3.A7 J3.A8 J3.A10 J3.A11 J3.B2 J3.B3 J3.B6 J3.B7 J3.B8 J3.B10 J3.B11 LED1.0 R1.0 R2.0 R3.0 R4.0 R5.0 R6.0 R7.0 R8.0 R9.0 R10.0 R11.0 R12.0 R13.0 R14.0 R15.0 U1.0 U2.1 U2.5 U2.8
copper on no net: | length 44.3
  Top Layer w0.305: 65.532,40.945 68.224,40.945 68.224,43.79 65.532,43.79 65.532,40.945
  Layer 1 w0.305: 65.516,38.09 65.516,40.935 68.208,40.935 68.208,38.09 65.516,38.09
  Layer 2 w0.305: 65.516,35.245 65.516,38.09 68.208,38.09 68.208,35.245 65.516,35.245
  Bottom Layer w0.305: 65.504,32.35 68.197,32.35 68.197,35.195 65.504,35.195 65.504,32.35

## Polygon pours and split planes (outlines as drawn)
GND on Top Layer "NONET_L01_P-001" (solid, pour order 1): 16.739,33.858 16.739,30.175 16.027,30.175 16.027,25.4 20.168,25.4 20.168,44.806 16.078,44.806 16.078,40.792 15.215,40.792 15.215,37.203 13.462,37.203 13.462,34.468 13.259,34.265 10.871,34.265 10.871,30.404 14.961,30.404 14.961,33.858
GND on Top Layer "NONET_L01_P-001" (solid, pour order 19): 3.988,30.168 3.988,29.972 7.264,29.972 7.264,30.195 8.331,30.195 8.331,35.636 6.278,35.636 6.278,40.102 8.712,40.102 8.712,44.526 0,44.526 0,30.168
16V on Top Layer "NONET_L01_P-001" (solid, pour order 9): 29.058,7.671 29.058,6.833 54.305,6.833 54.305,13.36 51.943,13.36 51.943,13.944 49.149,13.944 49.149,15.672 27.711,15.672 27.711,17.78 27.61,17.78 25.895,18.694 23.876,20.256 22.752,21.458 cw(c27.712,25.299) 22.19,22.321 21.082,24.663 20.907,25.298 14.732,25.298 14.732,30.23 7.29,30.195 7.29,28.931 3.988,28.931 3.988,30.18 0,30.161 0,7.671
GND on Top Layer "NONET_L01_P-001" (solid, pour order 10): 44.882,21.59 44.882,15.748 40.437,15.748 40.437,21.59 42.012,21.59
VUSB on Top Layer "NONET_L01_P-001" (solid, pour order 18): 15.977,40.386 14.986,40.386 14.986,37.36 13.742,37.36 9.169,37.36 9.169,35.636 5.764,35.636 5.764,40.102 8.695,40.102 8.695,43.028 15.977,43.028
GND on Top Layer "NONET_L01_P-001" (solid, pour order 6): 64.25,11.854 68.221,11.854 68.221,17.747 82.776,17.747 82.776,23.368 64.282,23.368
GND on Top Layer "NONET_L01_P-001" (solid, pour order 20): 72.39,6.833 72.39,1.372 ccw(c73.762,1.372) 73.762,0 80.903,0 80.874,2.845 82.144,2.845 ccw(c82.144,3.302) 82.601,3.302 82.601,6.858 72.415,6.858
GND on Top Layer "NONET_L01_P-001" (solid, pour order 13): 1.219,3.023 ccw(c0.787,3.023) 0.787,3.454 0.686,3.454 cw(c0.686,4.14) 0,4.14 0,6.807 71.12,6.807 71.12,1.27 cw(c69.825,1.27) 69.825,-0.025 4.166,-0.025 4.14,0 1.393,0 cw(c1.393,0.173) 1.219,0.173
GND on Top Layer "NONET_L01_P-001" (solid, pour order 16): 44.12,23.876 49.759,23.876 49.759,27.178 44.12,27.178
GND on Top Layer "NONET_L01_P-001" (solid, pour order 15): 80.899,50.505 1.219,50.505 1.219,44.282 80.899,44.282
GND on Top Layer "NONET_L01_P-001" (solid, pour order 11): 57.201,33.02 57.201,27.127 60.782,27.127 60.782,33.02
GND on Top Layer "NONET_L01_P-001" (solid, pour order 12): 44.272,18.161 51.689,18.161 52.324,17.526 55.753,17.526 55.905,17.374 55.905,15.113 49.149,15.113 49.149,15.799 44.348,15.799 44.272,15.875
15V on Top Layer "NONET_L01_P-001" (solid, pour order 8): 42.57,23.876 53.746,23.876 53.746,19.253 50.495,19.253 48.031,21.717 42.57,21.717
no net on Top Overlay "NONET_L01_P-001" (solid): 47.523,6.325 47.523,16.332 37.516,16.332 37.516,6.325
no net on Top Solder "NONET_L01_P-001" (solid): 80.874,50.462 80.874,48.039 1.219,48.039 1.219,50.462
no net on Top Solder "NONET_L01_P-001" (solid, pour order 14): 1.219,0 1.219,2.554 80.924,2.554 80.924,0
no net on Bottom Solder "NONET_L01_P-001" (solid): 76.581,50.47 76.581,47.168 4.953,47.168 4.953,50.47
no net on Bottom Solder "NONET_L01_P-001" (solid): 5.105,0.051 5.105,3.353 76.733,3.353 76.733,0.051
GND on Layer 1 "NONET_L01_P-001" (solid, pour order 3): 80.874,2.845 82.194,2.845 ccw(c82.194,3.251) 82.601,3.251 82.601,44.577 ccw(c81.509,44.577) 81.509,45.669 cw(c81.509,46.304) 80.874,46.304 80.874,50.495 4.648,50.495 1.168,50.495 1.168,47.295 cw(c1.092,47.295) 1.092,47.219 0.533,47.219 ccw(c0.533,46.711) 0.025,46.711 0.025,4.064 ccw(c0.66,4.064) 0.66,3.429 0.762,3.429 cw(c0.762,2.972) 1.219,2.972 1.219,0 69.774,0 ccw(c69.774,1.371) 71.145,1.372 71.145,9.044 ccw(c70.426,9.044) 70.426,9.764 60.153,9.764 cw(c60.153,10.136) 59.78,10.136 59.78,10.49 cw(c60.097,10.49) 60.097,10.807 76.461,10.806 cw(c76.461,10.436) 76.832,10.436 76.832,10.036 cw(c76.536,10.036) 76.536,9.74 73.035,9.74 ccw(c73.035,9.085) 72.379,9.085 72.379,1.347 ccw(c73.732,1.353) 73.738,0 80.874,0
GND on Bottom Layer "NONET_L01_P-001" (solid, pour order 2): 80.924,2.769 81.026,2.87 82.22,2.87 ccw(c82.22,3.226) 82.575,3.226 82.575,44.628 ccw(c81.534,44.628) 81.534,45.669 81.509,45.669 cw(c81.509,46.279) 80.899,46.279 80.899,48.311 cw(c80.924,48.311) 80.924,48.336 78.765,50.495 1.219,50.495 1.219,47.32 cw(c1.118,47.32) 1.118,47.219 0.457,47.219 ccw(c0.457,46.736) -0.025,46.736 -0.025,4.115 ccw(c0.66,4.115) 0.66,3.429 0.864,3.429 cw(c0.864,3.073) 1.219,3.073 1.219,0.025 69.842,0.025 ccw(c69.842,1.322) 71.139,1.322 71.139,9.082 ccw(c70.414,9.082) 70.414,9.807 60.207,9.807 cw(c60.207,10.221) 59.793,10.221 59.793,10.389 cw(c60.259,10.389) 60.259,10.854 76.349,10.854 cw(c76.349,10.324) 76.879,10.324 76.879,10.156 cw(c76.427,10.156) 76.427,9.703 72.87,9.703 ccw(c72.87,9.147) 72.314,9.147 72.314,1.524 ccw(c73.812,1.524) 73.812,0.025 80.848,0.025 80.924,0.102
15V on Layer 2 "NONET_L01_P-001" (solid, pour order 5): 80.899,2.845 82.144,2.845 ccw(c82.144,3.302) 82.601,3.302 82.601,44.577 ccw(c81.509,44.577) 81.509,45.669 81.483,45.669 cw(c81.483,46.253) 80.899,46.253 80.899,50.364 ccw(c80.674,50.236) 80.674,50.495 1.187,50.495 1.225,47.498 cw(c0.968,47.501) 0.965,47.244 0.483,47.244 ccw(c0.483,46.761) 0,46.761 0,4.115 ccw(c0.686,4.115) 0.686,3.429 0.813,3.429 cw(c0.813,2.997) 1.245,2.997 1.245,0.051 69.858,0.051 ccw(c69.858,1.347) 71.154,1.347 71.154,9.017 ccw(c70.404,9.017) 70.404,9.768 60.159,9.768 cw(c60.159,10.104) 59.822,10.104 59.822,10.414 cw(c60.197,10.414) 60.197,10.789 76.468,10.789 cw(c76.468,10.401) 76.856,10.401 76.856,10.194 cw(c76.364,10.194) 76.364,9.703 73.092,9.703 ccw(c73.092,8.991) 72.38,8.991 72.38,1.166 ccw(c73.514,1.184) 73.531,0.051 80.884,0.051 ccw(c80.884,0.069) 80.899,0.078

## Keep-outs
Keep-Out Layer:
  lines w0.15: 64.702,27.036 cw(c64.691,27.036) 64.691,27.026 64.603,27.026 ccw(c64.603,27.499) 65.076,27.499 65.076,29.938 65.076,43.707 ccw(c64.774,43.707) 64.774,44.01 64.356,44.01 ccw(c64.356,43.663) 64.009,43.663 64.009,29.987 64.009,27.462 ccw(c64.435,27.462) 64.435,27.036 64.732,27.036 ; 0,4.089 ccw(c0.635,4.089) 0.635,3.454 0.737,3.454 cw(c0.737,2.972) 1.219,2.972 1.219,0 69.85,0 ccw(c69.85,1.27) 71.12,1.27 71.12,2.362 71.12,9.042 ccw(c70.434,9.042) 70.434,9.728 60.164,9.728 cw(c60.164,10.075) 59.817,10.075 59.817,10.493 cw(c60.119,10.493) 60.119,10.795 76.452,10.795 cw(c76.452,10.414) 76.833,10.414 76.833,10.158 cw(c76.403,10.158) 76.403,9.728 73.05,9.728 ccw(c73.05,9.042) 72.365,9.042 72.365,2.362 72.365,1.27 ccw(c73.635,1.27) 73.635,0 77.705,0 80.746,0 81.577,0 81.128,2.591 81.128,2.845 81.813,2.845 82.194,2.845 ccw(c82.194,3.251) 82.601,3.251 82.601,44.552 ccw(c81.483,44.552) 81.483,45.669 cw(c81.483,46.233) 80.919,46.233 80.919,46.787 80.919,50.5 77.716,50.5 1.219,50.5 1.219,47.463 cw(c0.975,47.463) 0.975,47.219 0.508,47.219 ccw(c0.508,46.711) 0,46.711 0,4.089 ; 14.63,7.179 ccw(c14.977,7.179) 14.977,6.833 28.653,6.833 ccw(c28.653,7.263) 29.083,7.263 29.083,7.518 ccw(c28.702,7.518) 28.702,7.899 14.933,7.899 ccw(c14.933,7.597) 14.63,7.597 14.63,7.179
  lines w0.254: 23.932,30.597 23.932,30.597 ; 39.043,25.39 cw(c39.536,25.39) 39.536,25.883 41.636,25.883 cw(c41.636,25.373) 42.146,25.373 cw(c31.521,28.092) 42.17,30.716 cw(c41.705,30.716) 41.705,30.251 39.522,30.251 cw(c39.522,30.707) 39.067,30.707 39.067,30.728 ccw(c31.521,28.092) 39.043,25.39

## Other copper
Top Layer:
  text "1" at 66.346,41.385 h3.05
Layer 1:
  pour cut-out: 65.303,44.069 65.303,32.08 68.453,32.08 68.453,44.069
  text "2" at 66.166,38.532 h3.05
Layer 2:
  pour cut-out: 65.278,44.069 65.278,32.08 68.402,32.08 68.402,44.094 65.354,44.094
  text "3" at 66.167,35.705 h3.05
Bottom Layer:
  pour cut-out: 69.952,0 ccw(c69.952,1.143) 71.095,1.143 71.095,3.327 cw(c71.145,3.327) 71.145,3.378 72.365,3.378 72.365,1.225 ccw(c73.575,1.225) 73.575,0.015 70.028,0.015
  pour cut-out: 65.303,44.094 68.478,44.094 68.478,32.08 65.303,32.08
  text "4" at 66.126,32.796 h3.05

## Silkscreen, mask and mechanical layers (free items; w line width, h text height)
Top Overlay:
  lines w0.1: -2.075,10.426 -0.584,10.426 -0.584,21.926 -2.075,21.926 ; -0.711,32.309 -0.711,41.961 ; -0.711,37.135 -1.118,37.135 -1.118,16.176 -0.584,16.176 ; 78.623,36.982 83.972,36.982 83.972,21.598 83.515,21.598 ; 83.515,13.401 83.515,29.794
  text "VUSB" at 22.989,39.426 h2.29
  text "GND" at 29.486,39.426 h2.29
  text "10V" at 68.224,30.175 h3.5
  text "15V" at 59.36,20.918 h2.29
  text "Vz" at 68.504,10.973 h3.17
  text "16V" at 29.693,9.259 h2.29
  text "PG" at 78.842,7.671 h1.5 r90
Top Solder:
  pour cut-out: 69.949,-0.023 ccw(c69.949,1.12) 71.092,1.12 71.092,3.305 cw(c71.142,3.305) 71.142,3.356 72.362,3.356 72.362,1.202 ccw(c73.572,1.202) 73.572,-0.008 70.025,-0.008
  lines w0.5: 1.638,8.928 4.331,8.928 ; 2.032,8.223 3.912,8.223 ; 2.642,7.518 3.277,7.518 ; 2.972,8.954 2.972,9.881
  text "TEN399 2V1 4024" at 17.221,45.133 h3.48
  text "+10.000000V" at 55.245,45.136 h3.5
  text "16-20V" at 2.21,22.885 h3
  text "www.CircuitValley.Com" at 7.95,3.759 h2.5
Bottom Solder:
  pour cut-out: 69.949,-0.023 ccw(c69.949,1.12) 71.092,1.12 71.092,3.305 cw(c71.142,3.305) 71.142,3.356 72.362,3.356 72.362,1.202 ccw(c73.572,1.202) 73.572,-0.008 70.025,-0.008
  text "www.CircuitValley.Com" at 70.155,7.188 h3
  text "TEN399 2V1 4024" at 69.977,4.064 h3.48